# EAGLE board Qwiic_Spectral_Sensor_AS7341L (EAGLE 9.4.2)
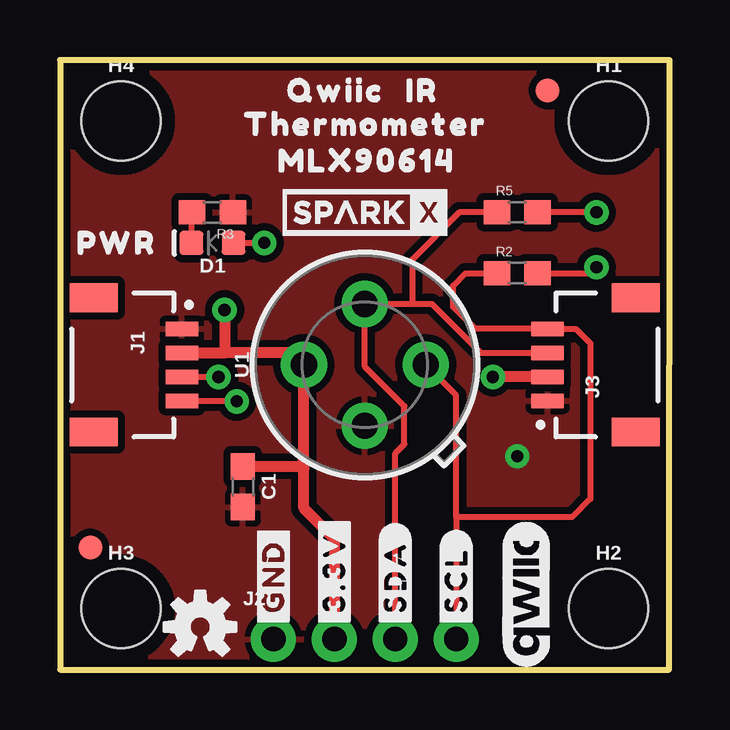
[diagram p0: board, top side]
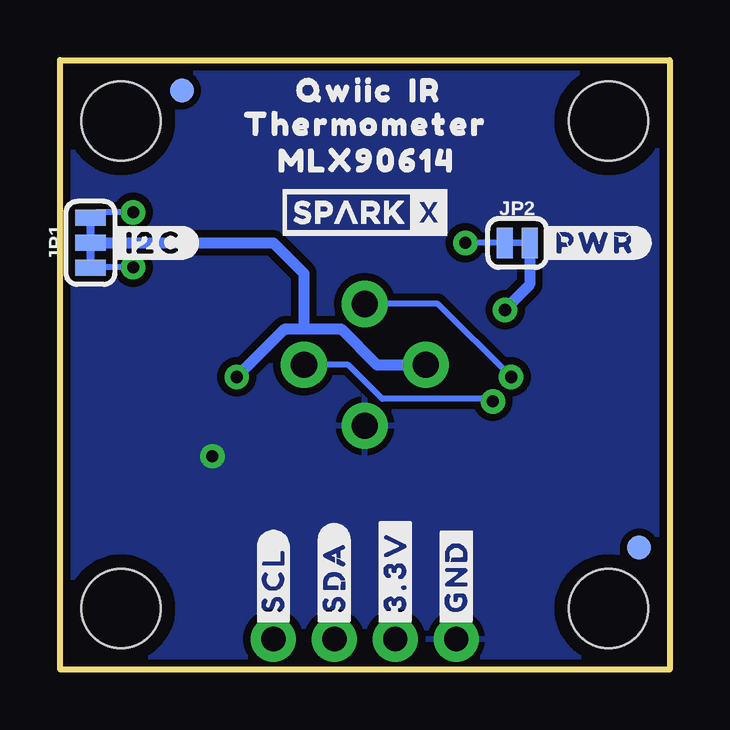
[diagram p1: board, bottom side, seen from below]

Size 25.4 x 25.4 mm. Coordinates in mm from the lower left corner, seen from the top.
Outline: 0,0 25.38,0 25.4,25.4 0,25.4 0,0
Copper layers (1*16): Top 0.035mm / dielectric 1.5mm / Bottom 0.035mm
Design rules "SparkFun": minimum track width 8mil, minimum drill 20mil, track to track 8mil, track to pad 8mil, pad to pad 8mil, via to via 8mil, smd to smd 8mil, copper to edge 8mil, drill to drill 8mil, minimum pad ring 12mil, minimum via ring 10mil, stop-mask expansion 4mil, vias tented up to drill 20mil, thermal gap 10mil

## Footprints (pad centres in the part's own frame; a part is rotated, then mirrored left to right if it is on the bottom)
0603 = smd 1.1 x 1: 1 -0.85,0; 2 0.85,0
LED-0603 = smd 1 x 1: A -0.877,0; C 0.877,0
FIDUCIAL-1X2 = smd 1 x 1: 1 0,0
STAND-OFF = hole 3.302: 0,0
JST04_1MM_RA = smd 0.6 x 1.35: 1 -1.5,0; 2 -0.5,0; 3 0.5,0; 4 1.5,0 | smd 1.2 x 2: NC1 2.8,-3.675; NC2 -2.8,-3.675
1X04_NO_SILK = drill 1.016 pad 1.88: 1 0,0; 2 2.54,0; 3 5.08,0; 4 7.62,0
SMT-JUMPER_3_2-NC_TRACE_SILK = smd 0.66 x 1.27: 1 -1.041,0; 2 0,0; 3 1.041,0
SMT-JUMPER_2_NC_TRACE_SILK = smd 0.66 x 1.27: 1 -0.521,0; 2 0.521,0
TO-39 = drill 1.1 pad 1.93: 1 2.54,0; 2 0,2.54; 3 -2.54,0; 4 0,-2.54

## Placement (x,y rotation side)
C1  0.1uF  [0603]  7.62,7.62 270 top
D1  RED  [LED-0603]  6.35,17.78 180 top
FD1  FIDUCIAL1X2  [FIDUCIAL-1X2]  1.27,5.08 0 top
FD2  FIDUCIAL1X2  [FIDUCIAL-1X2]  20.32,24.13 0 top
FD3  FIDUCIAL1X2  [FIDUCIAL-1X2]  1.27,5.08 0 bottom
FD4  FIDUCIAL1X2  [FIDUCIAL-1X2]  20.32,24.13 0 bottom
FRAME1  FRAME-LETTER  [CREATIVE_COMMONS]  20.32,-7.62 0 top  (outside the outline)
H1  STAND-OFF  [STAND-OFF]  22.86,22.86 0 top
H2  STAND-OFF  [STAND-OFF]  22.86,2.54 0 top
H3  STAND-OFF  [STAND-OFF]  2.54,2.54 0 top
H4  STAND-OFF  [STAND-OFF]  2.54,22.86 0 top
J1  QWIIC_RIGHT_ANGLE  [JST04_1MM_RA]  5.08,12.7 270 top
J2  [1X04_NO_SILK]  8.89,1.27 0 top
J3  QWIIC_RIGHT_ANGLE  [JST04_1MM_RA]  20.32,12.7 90 top
JP1  JUMPER-SMT_3_2-NC_TRACE_SILK  [SMT-JUMPER_3_2-NC_TRACE_SILK]  24.13,17.78 90 bottom
JP2  JUMPER-SMT_2_NC_TRACE_SILK  [SMT-JUMPER_2_NC_TRACE_SILK]  6.35,17.78 0 bottom
R2  2.2k  [0603]  19.05,16.51 0 top
R3  1k  [0603]  6.35,19.05 180 top
R5  2.2k  [0603]  19.05,19.05 0 top
U1  MLX90614  [TO-39]  12.7,12.7 0 top
U$1  OSHW-LOGOS  [OSHW-LOGO-S]  5.84,1.78 0 top
U$2  [QWIIC_6MM]  19.43,3.17 90 top
U$3  [QWIIC0]  8.76,24.13 0 top
U$4  [QWIIC0]  16.26,24.13 0 bottom
U$5  [IR0]  13.72,24.13 0 top
U$6  [SPARKX-SMALL]  12.7,19.05 0 top
U$7  [SPARKX-SMALL]  12.7,19.05 0 bottom
U$9  [#I2C#0]  23.37,17.78 0 bottom
U$10  [#PWR#0]  5.46,17.78 0 bottom
U$11  [IR0]  11.56,24.13 0 bottom
U$12  [PWR0]  0,17.78 0 top
U$13  [#GND#0]  8.89,1.65 90 top
U$14  [#GND#0]  8.89,1.65 90 bottom
U$15  [#3#3V#0]  11.43,1.65 90 top
U$16  [#3#3V#0]  11.43,1.65 90 bottom
U$17  [#SDA#0]  13.97,1.65 90 top
U$18  [#SDA#0]  13.97,1.65 90 bottom
U$19  [#SCL#0]  16.51,1.65 90 top
U$20  [#SCL#0]  16.51,1.65 90 bottom
U$21  [THERMOMETER0]  6.99,22.73 0 top
U$22  [THERMOMETER0]  18.41,22.73 0 bottom
U$23  [MLX906140]  8.38,21.21 0 top
U$24  [MLX906140]  17.02,21.21 0 bottom

## Library data of the parts
C1 = SparkFun-Capacitors; PROD_ID: CAP-08604
D1 = SparkFun-LED; PROD_ID: DIO-00819
FD1-FD4 FRAME1 U$1 U$2 = SparkFun-Aesthetics
H1-H4 = SparkFun-Hardware
J1 J3 = SparkFun-Connectors; PROD_ID: CONN-13694
J2 = SparkFun-Connectors
JP1 JP2 = SparkFun-Jumpers
R2 R5 = SparkFun-Resistors; PROD_ID: RES-08272
R3 = SparkFun-Resistors; PROD_ID: RES-07856
U1 = SparkFun-Sensors; PROD_ID: COMP-09719; SF_ID: SEN-09570
U$3-U$5 U$9-U$24 = output
U$6 U$7 = SparkX

## Nets
3.3V: C1.1 J1.2 J2.2 J3.2 JP1.2 JP2.2 U1.3
GND: C1.2 J1.1 J2.1 J3.1 R3.1 U1.4
N$1: JP1.1 R2.2
N$2: D1.C R3.2
N$3: JP1.3 R5.2
N$4: D1.A JP2.1
SCL: J1.4 J2.4 J3.4 R2.1 U1.1
SDA: J1.3 J2.3 J3.3 R5.1 U1.2

## Tracks (layer width: path | path; a pad name or v marks a point on that pad's centre or on a via)
3.3V  (via drill 0.51)
  Top 0.254: 6.87,13.21 6.86,13.2 | 18.04,12.2 v18.03,12.19
  Top 0.457: J2.2 11.43,5.46 10.16,6.73 10.16,8.38 | J1.2 6.86,13.2 9.66,13.2 U1.3 10.16,8.38 | J3.2 18.04,12.2 | v6.86,14.99 6.87,14.97 6.87,13.21 | C1.1 10.07,8.47 10.16,8.38
  Bottom 0.457: v18.03,12.19 16.03,14.2 15.24,14.2 | 15.24,14.2 13.69,14.2 12.19,12.7 U1.3 | v6.86,14.99 6.87,15 5.83,16.04 JP2.2 | 15.24,14.2 15.24,16.51 16.51,17.78 JP1.2
GND  (via drill 0.51)
  other vias: 19.05,8.89
  pour Top (isolate 0.305): 0,25.4 0,0 25.4,0 25.4,25.4
  pour Bottom (isolate 0.305): 0,25.4 0,0 25.4,0 25.4,25.4
N$1  (via drill 0.51)
  Top 0.254: R2.2 22.1,16.51 v22.35,16.76
  Bottom 0.254: v22.35,16.76 24.13,16.76 JP1.1
N$2
  Top 0.254: R3.2 5.47,19.02 D1.C
N$3  (via drill 0.51)
  Top 0.254: v22.35,19.05 R5.2
  Bottom 0.254: v22.35,19.05 23.9,19.05 JP1.3
N$4  (via drill 0.51)
  Top 0.254: D1.A v8.51,17.78
  Bottom 0.254: JP2.1 v8.51,17.78
SCL  (via drill 0.51)
  Top 0.254: 16.51,6.35 16.51,11.43 U1.1 | 16.51,6.35 J2.4 | 16.51,6.35 21.34,6.35 22.1,7.11 22.1,13.59 21.49,14.2 J3.4 17.3,14.2 16.38,15.11 16.38,16 16.89,16.51 R2.1 | J1.4 7.34,11.2 v7.37,11.18
  Bottom 0.254: v7.37,11.18 7.47,11.28 11.97,11.28 13.39,12.7 U1.1
SDA  (via drill 0.51)
  Top 0.254: J3.3 17.53,13.2 15.49,15.24 14.73,15.24 | J2.3 13.97,9.02 14.35,9.4 14.35,10.98 12.7,12.63 U1.2 14.73,15.24 | J1.3 v6.6,12.2 v6.6,12.19 | R5.1 16.64,19.05 14.67,17.08 14.67,15.3 14.73,15.24
  Bottom 0.254: v6.6,12.19 9.65,15.24 U1.2

## Text on the board
tDocu: Priyanka Makin